# Altium PCB Digital_Clock_PCB_4.0.PcbDoc
Units mm, origin at the board's own origin, x right, y up, seen from the top; angles counter-clockwise.
Board outline 91 x 51 mm, 2 copper layers (Top Layer, Bottom Layer); 43 components, 41 nets, 191 pads, 392 vias.
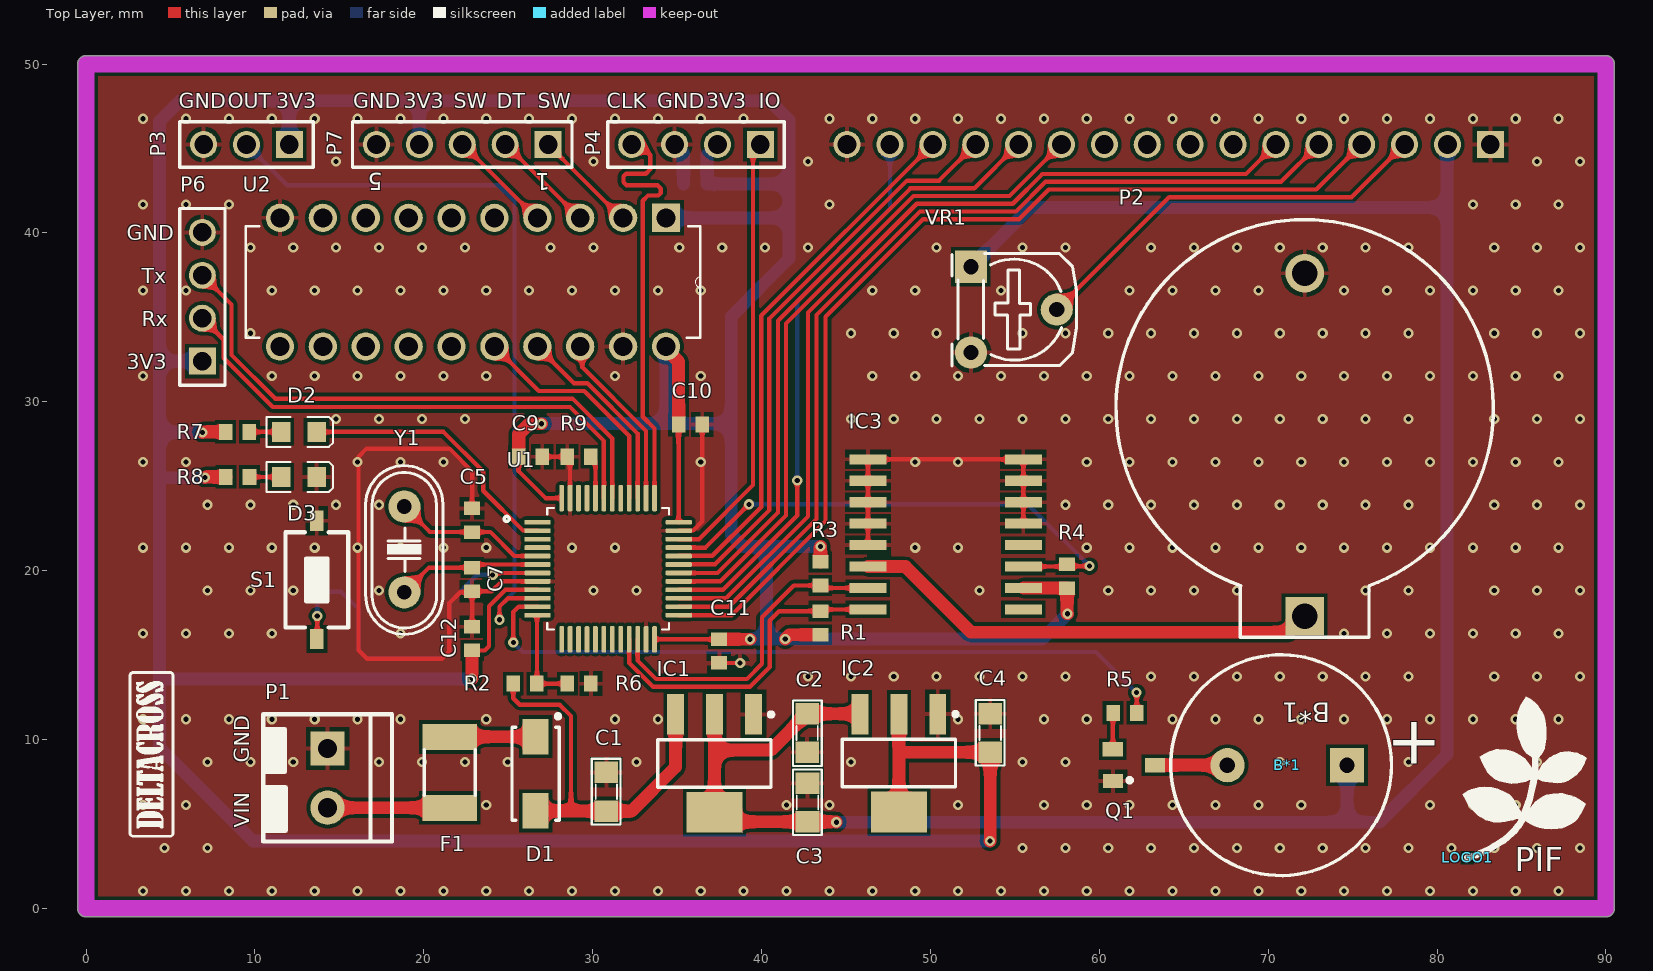
[diagram p0: Top Layer view]
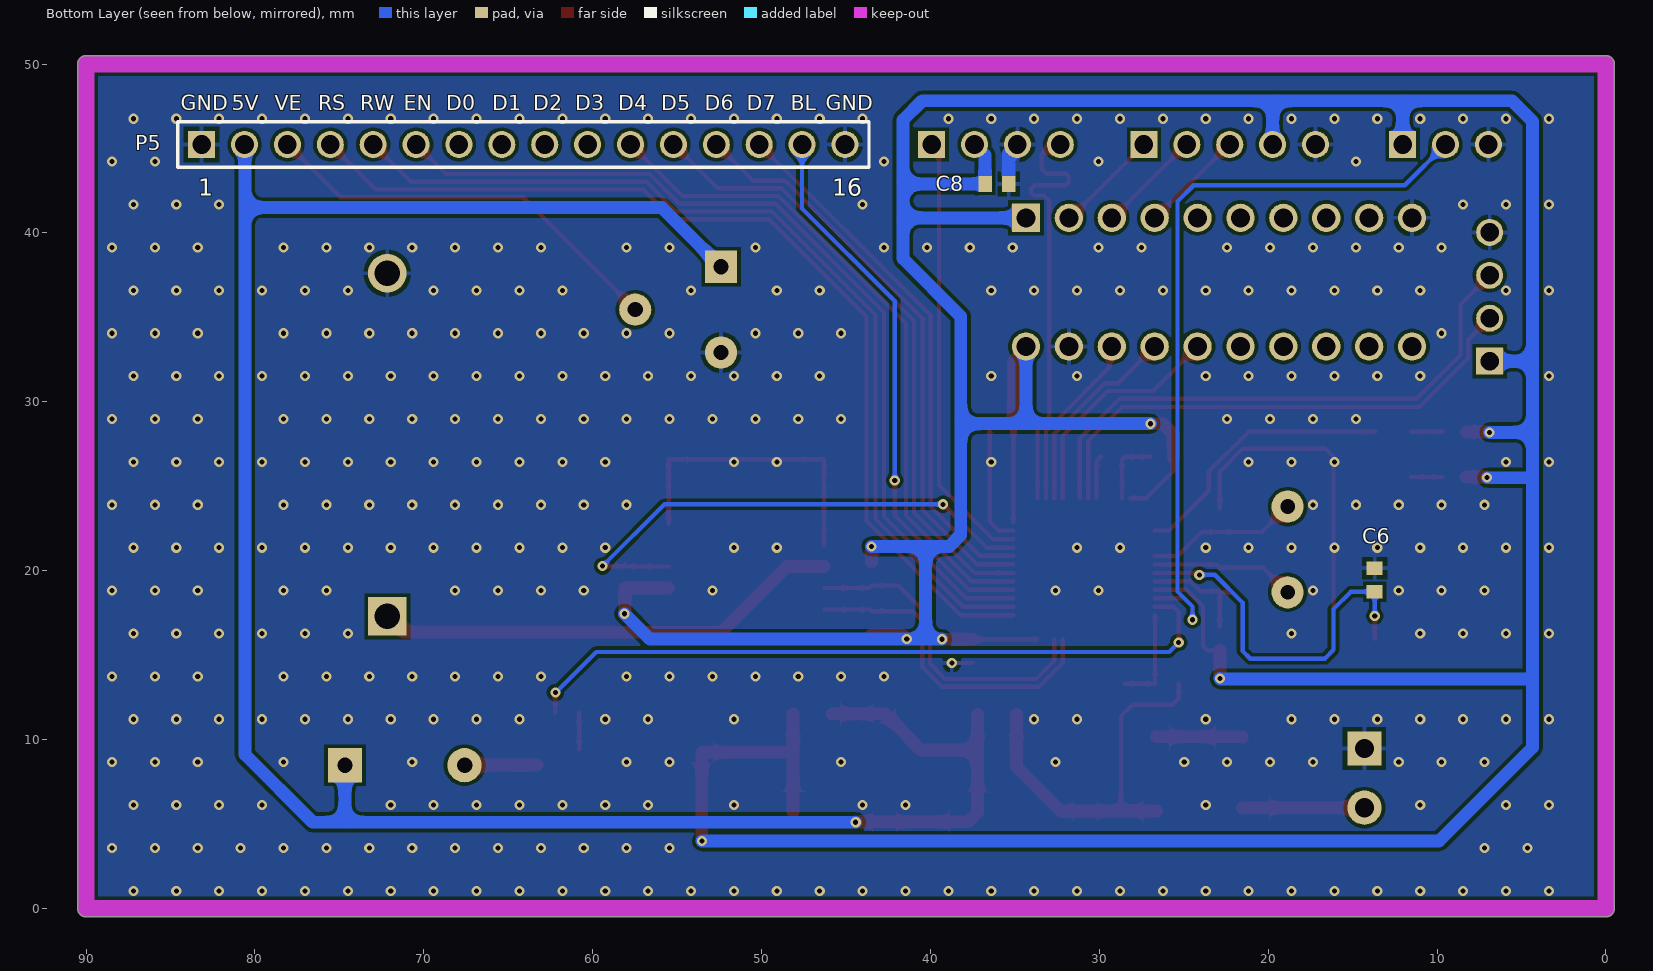
[diagram p1: Bottom Layer view, seen from below]
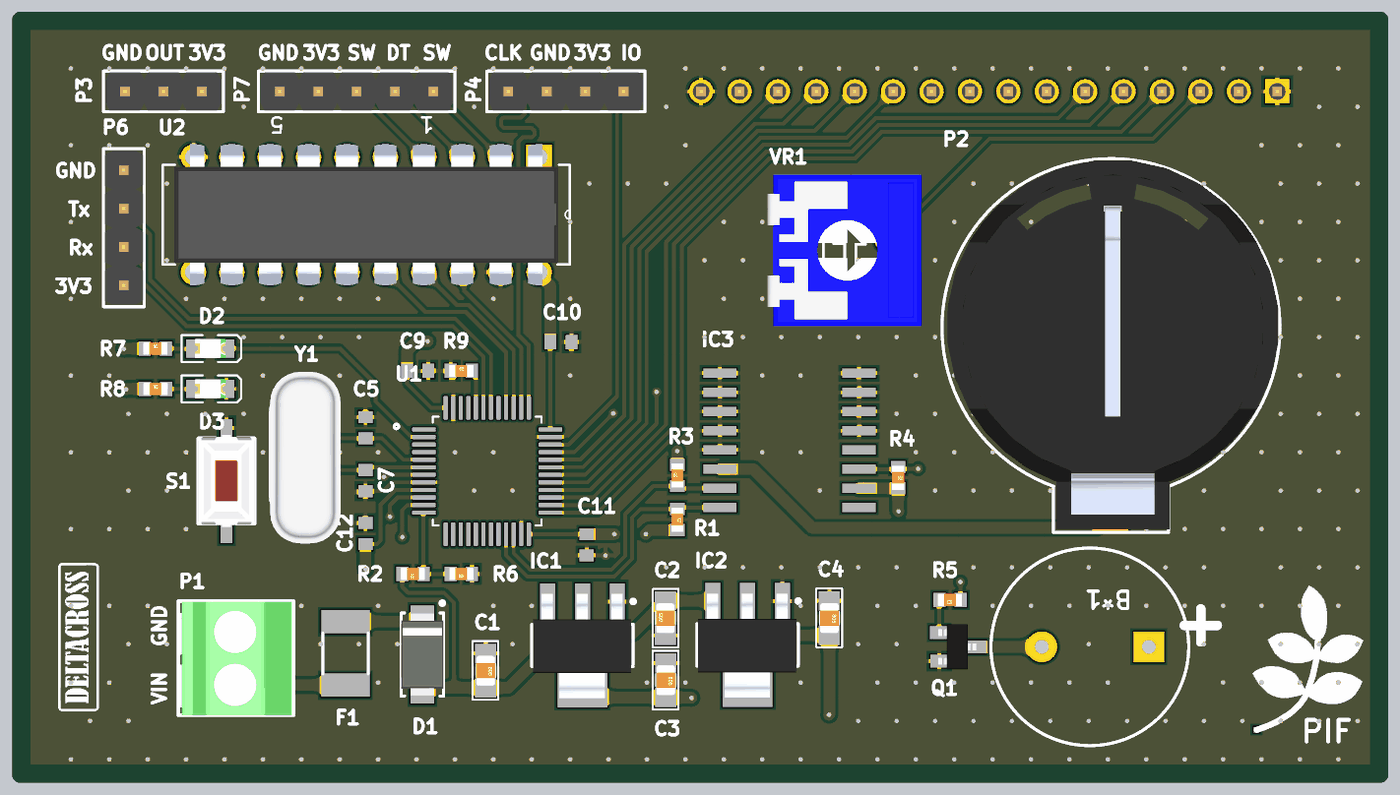
[diagram p2: 3D render of the assembled board from above, using the file's embedded part models]

## Layer stack, top to bottom
Top Solder: solder mask 0.0102, Solder Resist, Dk 3.5
Top Layer: signal copper 0.0356
Dielectric 1: dielectric 0.32, FR-4, Dk 4.8
Bottom Layer: signal copper 0.0356
Bottom Solder: solder mask 0.0102, Solder Resist, Dk 3.5

## Board outline
0,-0.5 cw(c0,0) -0.5,0 -0.5,50 cw(c0,50) 0,50.5 90,50.5 cw(c90,50) 90.5,50 90.5,0 cw(c90,0) 90,-0.5

## Design rules (kind name [scope] priority, off if disabled: settings)
Clearance [All] p1: gap=0.203 ignorepadtopadclearanceinfootprint=FALSE
PolygonConnect [All] p1: connectstyle=Relief reliefconductorwidth=0.254 reliefentries=4 polygonreliefangle="90 Angle" airgapwidth=0.254
RoutingVias [All] p1: holewidth=0.711 width=1.27 viastyle="Through Hole" minholewidth=0.3 minwidth=0.6 maxholewidth=0.711 maxwidth=1.27
SolderMaskExpansion [All] p1: expansion=0.102 istentingtop=FALSE
Width [All] p1: maxlimit=0.762 minlimit=0.254 preferedwidth=0.381
30 further rules are at their usual default settings.

## Components (designator, comment, footprint, x,y, rotation, side; value= is the part's Value field where it differs from the comment)
B*1 "Buzzer" BUZZER 72.669,8.484 r180 top
C1 "Cap Non-Pol SMD" CAP-SM-0805 30.81,8.052 r270 top value=10uF
C2 "Cap Non-Pol SMD" CAP-SM-0805 42.697,9.246 r90 top value=10uF
C3 "Cap Non-Pol SMD" CAP-SM-0805 42.723,7.417 r270 top value=10uF
C4 "Cap Non-Pol SMD" CAP-SM-0805 53.543,11.532 r270 top value=10uF
C5 "Cap Non-Pol SMD" CAP-SM-0603 22.86,22.987 r270 top value=22pF
C6 "Cap Non-Pol SMD" CAP-SM-0603 13.691,19.456 r270 bottom value=100nF
C7 "Cap Non-Pol SMD" CAP-SM-0603 22.86,19.482 r270 top value=22pF
C8 "Cap Non-Pol SMD" CAP-SM-0603 36.068,42.901 r0 bottom value=100nF
C9 "Cap Non-Pol SMD" CAP-SM-0603 26.314,26.746 r180 top value=100nF
C10 "Cap Non-Pol SMD" CAP-SM-0603 35.789,28.651 r180 top value=100nF
C11 "Cap Non-Pol SMD" CAP-SM-0603 37.49,15.24 r90 top value=100nF
C12 "Cap Non-Pol SMD" CAP-SM-0603 22.86,15.977 r270 top value=100nF
D1 "D Schottky" SS34 26.619,7.976 r270 top
D2 "LED SMD" LED_0805_Blue 12.598,28.219 r0 top
D3 "LED SMD" LED_0805_Blue 12.598,25.552 r0 top
F1 "Fuse" "FUSE SMD" 21.539,8.052 r270 top
IC1 "LM1117" SOT223-4N 37.211,8.585 r270 top value=LM317
IC2 "LM1117" SOT223-4N 48.133,8.611 r270 top value=LM317
IC3 "DS3231" SO16W 50.902,22.149 r90 top
LOGO1 "LOGO PIF" "PIF LOGO BIG SSTOP" 81.509,2.642 r0 top
P1 "Domino 2" "DOMINO SMALL 2" 15.57,9.469 r270 top
P2 "VBAT" "VBAT CR2030" 72.161,27.457 r270 top
P3 "61300311121" 61300311121 9.498,45.237 r180 top
P4 "61300411121" 61300411121 36.119,45.237 r180 top
P5 "61301611121" 61301611121 64.11,45.237 r180 bottom
P6 "61300411121" 61300411121 6.883,36.22 r90 top
P7 "61300511121" 61300511121 22.276,45.237 r180 top
Q1 "C1815" SOT23B 62.052,8.484 r270 top
R1 "RESISTOR SMD" RES-SM-0603 43.485,17.591 r270 top value=10K
R2 "RESISTOR SMD" RES-SM-0603 26.684,13.31 r180 top value=20K
R3 "RESISTOR SMD" RES-SM-0603 43.485,19.137 r90 top value=10K
R4 "RESISTOR SMD" RES-SM-0603 58.09,20.36 r270 top value=10K
R5 "RESISTOR SMD" RES-SM-0603 62.205,11.582 r180 top value=22K
R6 "RESISTOR SMD" RES-SM-0603 29.885,13.31 r180 top value=10K
R7 "RESISTOR SMD" RES-SM-0603 8.28,28.219 r0 top value=1K
R8 "RESISTOR SMD" RES-SM-0603 8.292,25.552 r0 top value=1K
R9 "RESISTOR SMD" RES-SM-0603 28.51,26.746 r0 top value=100K
S1 "Tact SW - 2Pin" SW-SMD 13.665,19.456 r90 top
U1 "STM32F103C8T6" QFP50P900X900X160-48N 30.912,20.117 r0 top
U2 "SN74HC245N" DIP254P762X508-20 11.481,33.274 r270 top
VR1 "10K" "Varistor 1" 52.4,37.998 r270 top value="VR 10K"
Y1 "XTAL" XT2 18.847,21.26 r90 top

## Footprints (in the part's own frame and the unit in brackets; to place one, negate y for a bottom-side part, rotate by r counter-clockwise, add the part's x,y. Pads: shape width x height; smd on the part's side, far side on the other; paste and mask are expansions set on the pad)
61300311121 [mm] "Pin Header, pitch 2.54 mm, THT, Vertical, single row, 3p"
  rect 1.6x1.6 hole 1.1: 1(-2.54,0)
  round 1.6 hole 1.1: 2(0,0) 3(2.54,0)
  silkscreen extent -3.96,-1.35 3.96,1.35, body extent -3.81,-1.27 3.81,1.27, height 8.57
61300411121 [mm] "Pin Header, pitch 2.54 mm, THT, Vertical, single row, 4p"
  rect 1.6x1.6 hole 1.1: 1(-3.81,0)
  round 1.6 hole 1.1: 2(-1.27,0) 3(1.27,0) 4(3.81,0)
  silkscreen extent -5.23,-1.35 5.23,1.35, body extent -5.08,-1.27 5.08,1.27, height 8.57
61300511121 [mm] "Pin Header, pitch 2.54 mm, THT, Vertical, single row, 5p"
  rect 1.6x1.6 hole 1.1: 1(-5.08,0)
  round 1.6 hole 1.1: 2(-2.54,0) 3(0,0) 4(2.54,0) 5(5.08,0)
  silkscreen extent -6.5,-1.35 6.5,1.35, body extent -6.35,-1.27 6.35,1.27, height 8.57
61301611121 [mm] "Pin Header, pitch 2.54 mm, THT, Vertical, single row, 16p"
  rect 1.6x1.6 hole 1.1: 1(-19.05,0)
  round 1.6 hole 1.1: 2(-16.51,0) 3(-13.97,0) 4(-11.43,0) 5(-8.89,0) 6(-6.35,0) 7(-3.81,0) 8(-1.27,0) 9(1.27,0) 10(3.81,0) 11(6.35,0) 12(8.89,0) 13(11.43,0) 14(13.97,0) 15(16.51,0) 16(19.05,0)
  silkscreen extent -20.47,-1.35 20.47,1.35, body extent -20.32,-1.27 20.32,1.27, height 8.57
BUZZER [mil]
  rect 80x80 hole 36: 1(-78.73,0)
  round 80 hole 36: 2(200,0)
  silkscreen extent -182,-257 332,257
CAP-SM-0603 [mm] "SMD Ceramic Capacitor Size 0603"
  rect 0.8x0.95 smd: 1(-0.7,0) 2(0.7,0)
  body extent -0.85,-0.45 0.85,0.45, height 0.6
CAP-SM-0805 [mil]
  rect 50x55 smd: 1(0,0) 2(90,0)
  silkscreen extent -32,-34 121,33, body extent 6,-25 84,25, height 31
DIP254P762X508-20 [mil]
  rect 66x66 hole 44: 1(-300,900)
  round 66 hole 44: 2(-300,800) 3(-300,700) 4(-300,600) 5(-300,500) 6(-300,400) 7(-300,300) 8(-300,200) 9(-300,100) 10(-300,0) 11(0,0) 12(0,100) 13(0,200) 14(0,300) 15(0,400) 16(0,500) 17(0,600) 18(0,700) 19(0,800) 20(0,900)
  silkscreen extent -280,-80 -20,980, body extent -365,-50 65,950, height 200
"DOMINO SMALL 2" [mil] "3.5 mm"
  rect 80x80 hole 45: 1(0,-50)
  round 80 hole 45: 2(137.8,-50)
  silkscreen extent -80,-203 217,100, body extent -79,-192 217,95, height 335
"FUSE SMD" [mm] "SMD FUSE"
  rect 1.55x3.21 smd: 1(-2.1,0) 2(2.1,0)
  silkscreen extent -1.35,-1.5 1.35,1.51, body extent -2.37,-1.71 2.36,1.71, height 0.75
LED_0805_Blue [mm] "Chip LED, 2-Leads, Body 2.0x1.3mm, IPC Medium Density"
  rect 1.1x1.2 smd: 1(-1.05,0) 2(1.05,0)
  silkscreen extent -1.91,-0.89 2.03,0.89, body extent -1,-0.63 1,0.62, height 0.68
"PIF LOGO BIG SSTOP" [mil]
  rect 15x15 smd: 1(11,14)
  silkscreen extent 0,14 289,389
QFP50P900X900X160-48N [mm]
  rrect50% 1.56x0.28 smd: 1(-4.18,2.75) 2(-4.18,2.25) 3(-4.18,1.75) 4(-4.18,1.25) 5(-4.18,0.75) 6(-4.18,0.25) 7(-4.18,-0.25) 8(-4.18,-0.75) 9(-4.18,-1.25) 10(-4.18,-1.75) 11(-4.18,-2.25) 12(-4.18,-2.75) 25(4.18,-2.75) 26(4.18,-2.25) 27(4.18,-1.75) 28(4.18,-1.25) 29(4.18,-0.75) 30(4.18,-0.25) 31(4.18,0.25) 32(4.18,0.75) 33(4.18,1.25) 34(4.18,1.75) 35(4.18,2.25) 36(4.18,2.75)
  rrect50% 0.28x1.56 smd: 13(-2.75,-4.18) 14(-2.25,-4.18) 15(-1.75,-4.18) 16(-1.25,-4.18) 17(-0.75,-4.18) 18(-0.25,-4.18) 19(0.25,-4.18) 20(0.75,-4.18) 21(1.25,-4.18) 22(1.75,-4.18) 23(2.25,-4.18) 24(2.75,-4.18) 37(2.75,4.18) 38(2.25,4.18) 39(1.75,4.18) 40(1.25,4.18) 41(0.75,4.18) 42(0.25,4.18) 43(-0.25,4.18) 44(-0.75,4.18) 45(-1.25,4.18) 46(-1.75,4.18) 47(-2.25,4.18) 48(-2.75,4.18)
  silkscreen extent -6.15,-3.6 3.6,3.6
RES-SM-0603 [mm]
  rect 0.8x0.95 smd: 1(-0.014,0) 2(1.386,0)
  body extent -0.11,-0.4 1.49,0.4, height 0.3
SO16W [mm]
  rect 0.6x2.2 smd: 1(-4.445,-4.6) 2(-3.175,-4.6) 3(-1.905,-4.6) 4(-0.635,-4.6) 5(0.635,-4.6) 6(1.905,-4.6) 7(3.175,-4.6) 8(4.445,-4.6) 9(4.445,4.6) 10(3.175,4.6) 11(1.905,4.6) 12(0.635,4.6) 13(-0.635,4.6) 14(-1.905,4.6) 15(-3.175,4.6) 16(-4.445,4.6)
SOT23B [mm] "SOT 23B"
  rect 0.85x1.2 smd: 1(0.94,-1.245) 2(0,1.25) 3(-0.95,-1.25)
  silkscreen extent 0.77,-0.38 1.02,-0.13, body extent -1.5,-1.3 1.5,1.2, height 1.06
SOT223-4N [mm] "SOT223, 4-Leads, Body 6.5x3.5mm, Pitch 2.3mm, Lead Span 7mm, IPC Medium Density"
  rect 2.4x1 smd: 1(-2.9,2.3) 2(-2.9,0) 3(-2.9,-2.3)
  rect 2.4x3.3 smd: 4(2.9,0)
  silkscreen extent -3.02,-3.35 1.4,3.48, body extent -3.39,-3.27 3.5,3.23, height 1.72
SS34 [mm] "DO-214-AC/SMA Molded Diode, Body 5.3x2.6mm, IPC Medium Density"
  rect 2.1x1.55 smd: 1(-2.2,0) 2(2.2,0)
  silkscreen extent -3.52,-1.4 2.75,1.45, body extent -2.75,-1.4 2.75,1.4, height 2.3
SW-SMD [mm] "Switch SMD type"
  rect 1.2x0.8 smd: 1(-3.5,0) 2(3.5,0)
  silkscreen extent -2.82,-1.85 2.82,1.85, body extent -3.05,-1.85 3.05,1.85, height 2.5
"Varistor 1" [mil] "Resistor Variable"
  rect 75x75 hole 35: 1(0,0)
  round 75 hole 35: 2(100,200) 3(200,0)
  silkscreen extent -31,-44 231,246, body extent -68,-117 326,285, height 165
"VBAT CR2030" [mil]
  rect 90x90 hole 60: 1(400,0)
  round 90 hole 60: 2(-400,0)
  silkscreen extent -525,-440 449,440, body extent -523,-428 442,438, height 335
XT2 [mil] "Footpin for Crystal 2 pin"
  round 75 hole 34: 1(-100,0) 2(100,0)
  silkscreen extent -198,-90 195,90, body extent -233,-93 213,90, height 138

## Part data
C1 C2 C3 C4 C5 C6 C7 C8 C9 C10 C11 C12: "Capacitor"
D1: "Schottky Diode", Code_JEDEC=DO-214-AA, LatestRevisionDate=17-Jul-2002, LatestRevisionNote="Re-released for DXP Platform.", PackageDescription="DO-214-AA/SMB; 2 C-Bend Leads; Body 5.3 x 3.6 mm, inc. leads (LxW)", PackageReference=SMB, Published=8-Jun-2000, Publisher="Altium Limited"
D2 D3: "LED"
IC1 IC2: "Available in 1.8V, 2.5V, 2.85V, 3.3V, 5V, and  Adjustable Versions"
IC3: Package=None, Availability=Unavailable, MP=DS3231, Price=None
P1: "Domino, 2-Pin", LatestRevisionDate=17-Jul-2002, LatestRevisionNote="Re-released for DXP Platform.", Publisher="Altium Limited"
P2: library part "VBAT CR2032", "CR2032", Manufacturer="DANTONA INDUSTRIES", Manufacturer Part Number="CR2032 SANYO", ComponentLink1Description=http://www.farnell.com/datasheets/1797668.pdf, ComponentLink1URL=http://www.farnell.com/datasheets/1797668.pdf, ComponentLink2Description=/datasheets/DANTONA/CRSANYO.pdf, ComponentLink2URL=/datasheets/DANTONA/CRSANYO.pdf, Pricing 1="1=0.768, 5=0.655, 10=0.615, 25=0.565, 50=0.51, 100=0.46, 250=0.41 (USD)", RoHS=NA, Stock 1=1694, Supplier 1=Newark
P3: "WR-PHD Pin Header, THT, pitch 2.54mm, Single Row, Vertical, 3p", Contact Resistance=20mOhm, Manufacturer="Wurth Elektronik", Operating Temperature="-40 to +105degC", Rated Current=3A, Withstanding Voltage=500VAC, Working Voltage=250VAC, ComponentLink1Description=Manufacturer, ComponentLink1URL=http://www.we-online.de, ComponentLink2Description=Datasheet, ComponentLink2URL=https://www.we-online.com/catalog/datasheet/61300311121.pdf, Gender="Pin Header", Manufacturer Part Number=61300311121, Mounting Technology=THT, Orientation=Vertical, Packaging=Bag, Pin Number=3, Pitch=2.54mm, Published Date="May 2020", Row Number=Single
P4 P6: "WR-PHD Pin Header, THT, pitch 2.54mm, Single Row, Vertical, 4p", Contact Resistance=20mOhm, Manufacturer="Wurth Elektronik", Operating Temperature="-40 to +105degC", Rated Current=3A, Withstanding Voltage=500VAC, Working Voltage=250VAC, ComponentLink1Description=Manufacturer, ComponentLink1URL=http://www.we-online.de, ComponentLink2Description=Datasheet, ComponentLink2URL=https://www.we-online.com/catalog/datasheet/61300411121.pdf, Gender="Pin Header", Manufacturer Part Number=61300411121, Mounting Technology=THT, Orientation=Vertical, Packaging=Bag, Pin Number=4, Pitch=2.54mm, Published Date="May 2020", Row Number=Single
P5: "WR-PHD Pin Header, THT, pitch 2.54mm, Single Row, Vertical, 16p", Contact Resistance=20mOhm, Manufacturer="Wurth Elektronik", Operating Temperature="-40 to +105degC", Rated Current=3A, Withstanding Voltage=500VAC, Working Voltage=250VAC, ComponentLink1Description=Manufacturer, ComponentLink1URL=http://www.we-online.de, ComponentLink2Description=Datasheet, ComponentLink2URL=https://www.we-online.com/catalog/datasheet/61301611121.pdf, Gender="Pin Header", Manufacturer Part Number=61301611121, Mounting Technology=THT, Orientation=Vertical, Packaging=Bag, Pin Number=16, Pitch=2.54mm, Published Date="May 2020", Row Number=Single
P7: "WR-PHD Pin Header, THT, pitch 2.54mm, Single Row, Vertical, 5p", Contact Resistance=20mOhm, Manufacturer="Wurth Elektronik", Operating Temperature="-40 to +105degC", Rated Current=3A, Withstanding Voltage=500VAC, Working Voltage=250VAC, ComponentLink1Description=Manufacturer, ComponentLink1URL=http://www.we-online.de, ComponentLink2Description=Datasheet, ComponentLink2URL=https://www.we-online.com/catalog/datasheet/61300511121.pdf, Gender="Pin Header", Manufacturer Part Number=61300511121, Mounting Technology=THT, Orientation=Vertical, Packaging=Bag, Pin Number=5, Pitch=2.54mm, Published Date="May 2020", Row Number=Single
Q1: "NPN Bipolar Transistor"
R1 R2 R3 R4 R5 R6 R7 R8 R9: "Resistor"
S1: "Switch button 2 pin"
U1: "Mainstream Performance line, ARM Cortex-M3 MCU with 64 Kbytes Flash, 72 MHz CPU, motor control, USB and CAN", Package=None, Availability=Unavailable, MP=STM32F103C8T6, Price=None
U2: "Octal Bus Transceivers With 3-State Outputs 20-PDIP -40 to 85", Package="PDIP-20 Texas Instruments", Availability=Good, Check_prices=https://www.snapeda.com/parts/SN74HC245N/Texas%20Instruments/view-part/53757/?ref=eda, MF="Texas Instruments", MP=SN74HC245N, Price=None, Purchase-URL=https://pricing.snapeda.com/search/part/SN74HC245N/?ref=eda, SnapEDA_Link=https://www.snapeda.com/parts/SN74HC245N/Texas%20Instruments/view-part/53757/?ref=snap
VR1: library part "Var Resistor", "Var Resistor"
Y1: "Crystal Oscillator", LatestRevisionDate=17-Jul-2002, LatestRevisionNote="Re-released for DXP Platform.", PackageDescription="Crystal, Thru-Hole; 2 Leads; Body 3.1 x 8.2 mm (Dia.xH)", PackageReference=R38, Published=8-Jun-2000, Publisher="Altium Limited"

## Via types
v1: diameter 0.6, hole 0.3, Top Layer to Bottom Layer, tented both sides, 392 vias

## Nets (pads, with @x,y where several pads share a name; then routed paths per layer and width w, separated by ;. In a path a pad name is that pad's centre, name@x,y a point inside that pad or via, vN(x,y) a via of type N, cw(c..) or ccw(c..) an arc to the next point about the centre after c; other vN are vias at no path point)
3V3: C4.2 C8.2 C9.2 C10.2 C11.2 C12.2 IC2.2 IC2.4 IC3.2 P3.1 P4.2 P6.1 P7.4 R1.2 R3.2 R4.2 R7.1 R8.1 U1.9 U1.24 U1.36 U1.48 U2.1 U2.20 | length 303.4
  Top Layer w0.254: C12.2 23.608,15.277 23.855,15.524 23.855,17.889 24.833,18.867 U1.9 ; C9.2 25.614,25.897 27.214,24.297 U1.48 ; U1.24 33.665,15.94 C11.2 ; C10.2 35.089,22.87 U1.36
  Top Layer w0.762: v1(6.883,28.194) 6.909,28.219 R7.1 ; v1(7.036,25.527) 7.061,25.552 R8.1 ; v1(22.86,13.614) C12.2 ; C9.2 25.614,28.078 26.238,28.702 v1(26.975,28.702) ; U2.20 34.341,33.118 35.089,32.37 C10.2 ; C11.2 v1(39.319,15.94) ; v1(41.402,15.951) 41.656,16.205 R1.2 ; R3.2 v1(43.485,21.438) ; IC2.4 48.133,9.271 ; IC2.2 48.133,9.271 ; v1(53.518,3.988) 53.543,4.013 C4.2 48.158,9.246 48.133,9.271 ; IC3.2 R4.2 58.09,17.475 v1(58.115,17.45)
  Bottom Layer w0.762: v1(6.883,28.194) 4.343,28.194 ; P6.1 4.343,32.41 ; v1@7.01,25.502 4.343,25.502 ; P3.1 12.04,47.828 ; P7.4 19.736,47.828 ; v1(22.86,13.614) 22.835,13.589 4.343,13.589 ; v1@26.979,28.706 34.341,28.706 ; U2.20 34.341,28.706 ; U2.1 41.631,40.894 ; P4.2 36.768,44.617 C8.2 41.631,42.901 ; v1@39.33,15.951 40.284,15.951 ; v1(43.485,21.438) 40.284,21.438 ; v1(53.518,3.988) 9.881,3.988 4.343,9.525 4.343,13.589 ; v1(58.115,17.45) 56.617,15.951 v1(41.402,15.951) 40.284,15.951 ; 4.343,13.589 4.343,25.502 ; 4.343,25.502 4.343,28.194 ; 4.343,28.194 4.343,32.41 ; 4.343,32.41 4.343,46.609 5.563,47.828 12.04,47.828 ; 12.04,47.828 19.736,47.828 ; 19.736,47.828 40.488,47.828 41.631,46.685 41.631,42.901 ; 34.341,28.706 38.202,28.706 ; 38.202,28.706 38.202,22.123 38.887,21.438 40.284,21.438 ; 38.202,28.706 38.202,35.052 41.631,38.481 41.631,40.894 ; 40.284,15.951 40.284,21.438 ; 41.631,40.894 41.631,42.901
5V: B*1.1 C2.2 C3.2 IC1.2 IC1.4 IC2.3 P5.2 VR1.1 | length 129.3
  Top Layer w0.762: IC1.2 37.211,9.373 ; C2.2@42.38,11.214 40.538,9.373 37.211,9.373 ; C2.2 45.812,11.532 IC2.3 ; v1(44.425,5.105) 44.399,5.131 C3.2 37.765,5.131 IC1.4 37.211,9.373
  Bottom Layer w0.762: v1(44.425,5.105) 74.676,5.105 ; VR1.1 55.905,41.504 80.594,41.504 ; B*1.1@74.676,8.477 74.676,5.105 ; P5.2@80.594,45.237 80.594,41.504 ; 74.676,5.105 76.581,5.105 80.594,9.119 80.594,41.504
ADC_PIN: R2.1 R6.2 U1.12 | length 5.9
  Top Layer w0.254: U1.12 26.711,17.367 26.698,17.354 R2.1 R6.2
BL: P5.15 U1.28 | length 33.1
  Top Layer w0.254: U1.28 37.714,18.867 42.113,23.266 v1(42.113,25.349)
  Bottom Layer w0.254: v1(42.113,25.349) 42.113,35.966 47.6,41.453 P5.15
BOOT0: R9.2 U1.44 | length 2.6
  Top Layer w0.254: R9.2 30.162,26.48 U1.44
BUZZER: R5.1 U1.11 | length 42.7
  Top Layer w0.254: v1(25.298,15.748) 25.298,17.551 25.614,17.867 U1.11 ; v1(62.205,12.776) 62.219,12.762 R5.1
  Bottom Layer w0.254: v1(25.298,15.748) 25.857,15.189 59.792,15.189 v1(62.205,12.776)
D4: P5.11 U1.29 | length 40
  Top Layer w0.254: U1.29 37.553,19.367 41.453,23.266 41.453,34.636 49,42.184 54.68,42.184 P5.11@57.734,45.237
D5: P5.12 U1.30 | length 37.3
  Top Layer w0.254: U1.30 37.393,19.867 40.97,23.444 40.97,34.8 48.811,42.641 52.598,42.641 P5.12@55.194,45.237
D6: P5.13 U1.31 | length 34.5
  Top Layer w0.254: U1.31 35.105,20.38 37.245,20.38 40.462,23.597 40.462,34.939 48.621,43.098 50.515,43.098 P5.13@52.654,45.237
D7: P5.14 U1.32 | length 31.8
  Top Layer w0.254: U1.32 35.105,20.88 37.085,20.88 39.507,23.302 39.509,23.302 39.98,23.773 39.98,35.103 P5.14@50.114,45.237
DHT_PIN: P3.2 U1.10 | length 45.6
  Top Layer w0.254: v1(24.486,17.094) 24.486,17.873 24.979,18.367 U1.10
  Bottom Layer w0.254: P3.2 11.911,42.824 24.409,42.824 25.375,41.859 25.375,18.771 24.486,17.882 v1(24.486,17.094)
EN: P5.6 U1.27 | length 53.5
  Top Layer w0.254: U1.27 37.899,18.367 42.748,23.216 42.748,35.285 49.19,41.726 54.87,41.726 56.628,43.485 68.682,43.485 P5.6@70.434,45.237
GND: C1.1 C2.1 C3.1 C4.1 C5.1 C6.1 C7.2 C8.1 C9.1 C10.1 C11.1 C12.1 D3.2 IC1.1 IC2.1 IC3.5 IC3.6 IC3.7 IC3.8 IC3.9 IC3.10 IC3.11 IC3.12 IC3.13 P1.1 P2.2 P3.3 P4.3 P5.1 P5.16 P6.4 P7.5 Q1.1 R6.1 R9.1 S1.2 U1.8 U1.23 U1.35 U1.47 U2.10 U2.19 VR1.3 | length 70.9
  Top Layer w0.254: C12.1 C7.2 ; C5.1 22.86,25.883 21.514,27.229 16.612,27.229 16.129,26.746 16.129,15.291 16.637,14.783 21.057,14.783 21.514,15.24 21.514,18.085 22.153,18.724 22.802,18.724 C7.2 ; U1.8 24.599,19.367 24.014,18.782 C7.2 ; C9.1 R9.1 28.662,26.58 U1.47 ; U1.35 35.105,22.38 35.951,22.38 36.489,22.918 C10.1 ; C11.1 38.724,14.54 v1(38.735,14.529) ; IC3.13 IC3.12 IC3.11 IC3.10 IC3.9 IC3.8 IC3.7 IC3.6 IC3.5
  Bottom Layer w0.762: P4.3 35.368,44.718 C8.1
  other v1: 3.378,1.041 5.918,1.041 8.458,1.041 10.998,1.041 13.538,1.041 16.078,1.041 18.618,1.041 21.158,1.041 23.698,1.041 26.238,1.041 28.778,1.041 31.318,1.041 33.858,1.041 36.398,1.041 38.938,1.041 41.478,1.041 44.018,1.041 46.558,1.041 49.098,1.041 51.638,1.041 54.178,1.041 56.718,1.041 59.258,1.041 61.798,1.041 64.338,1.041 66.878,1.041 69.418,1.041 71.958,1.041 74.498,1.041 77.038,1.041 79.578,1.041 82.118,1.041 84.658,1.041 87.198,1.041 4.648,3.581 7.188,3.581 55.448,3.581 57.988,3.581 60.528,3.581 63.068,3.581 65.608,3.581 68.148,3.581 70.688,3.581 73.228,3.581 75.768,3.581 78.308,3.581 80.848,3.581 83.388,3.581 85.928,3.581 88.468,3.581 3.378,6.121 5.918,6.121 10.998,6.121 23.698,6.121 41.478,6.121 44.018,6.121 51.638,6.121 56.718,6.121 59.258,6.121 61.798,6.121 64.338,6.121 66.878,6.121 69.418,6.121 71.958,6.121 79.578,6.121 82.118,6.121 84.658,6.121 87.198,6.121 7.188,8.661 9.728,8.661 12.268,8.661 17.348,8.661 19.888,8.661 22.428,8.661 24.968,8.661 32.588,8.661 45.288,8.661 55.448,8.661 57.988,8.661 70.688,8.661 78.308,8.661 83.388,8.661 85.928,8.661 88.468,8.661 3.378,11.201 5.918,11.201 8.458,11.201 10.998,11.201 13.538,11.201 16.078,11.201 18.618,11.201 23.698,11.201 31.318,11.201 33.858,11.201 51.638,11.201 56.718,11.201 59.258,11.201 64.338,11.201 66.878,11.201 69.418,11.201 71.958,11.201 74.498,11.201 77.038,11.201 79.578,11.201 82.118,11.201 84.658,11.201 87.198,11.201 42.748,13.741 45.288,13.741 47.828,13.741 50.368,13.741 52.908,13.741 55.448,13.741 57.988,13.741 63.068,13.741 65.608,13.741 68.148,13.741 70.688,13.741 73.228,13.741 75.768,13.741 78.308,13.741 83.388,13.741 85.928,13.741 88.468,13.741 3.378,16.281 5.918,16.281 8.458,16.281 10.998,16.281 18.618,16.281 74.498,16.281 77.038,16.281 79.578,16.281 82.118,16.281 84.658,16.281 87.198,16.281 7.188,18.821 9.728,18.821 12.268,18.821 17.348,18.821 30.048,18.821 32.588,18.821 52.908,18.821 60.528,18.821 63.068,18.821 65.608,18.821 68.148,18.821 75.768,18.821 78.308,18.821 83.388,18.821 85.928,18.821 88.468,18.821 3.378,21.361 5.918,21.361 8.458,21.361 10.998,21.361 13.538,21.361 16.078,21.361 18.618,21.361 21.158,21.361 23.698,21.361 28.778,21.361 31.318,21.361 49.098,21.361 51.638,21.361 59.258,21.361 61.798,21.361 64.338,21.361 66.878,21.361 69.418,21.361 71.958,21.361 74.498,21.361 77.038,21.361 79.578,21.361 82.118,21.361 84.658,21.361 87.198,21.361 7.188,23.901 9.728,23.901 12.268,23.901 14.808,23.901 17.348,23.901 57.988,23.901 60.528,23.901 63.068,23.901 65.608,23.901 68.148,23.901 70.688,23.901 73.228,23.901 75.768,23.901 78.308,23.901 83.388,23.901 85.928,23.901 88.468,23.901 3.378,26.441 5.918,26.441 16.078,26.441 18.618,26.441 21.158,26.441 36.398,26.441 49.098,26.441 51.638,26.441 59.258,26.441 61.798,26.441 64.338,26.441 66.878,26.441 69.418,26.441 71.958,26.441 74.498,26.441 77.038,26.441 79.578,26.441 82.118,26.441 84.658,26.441 87.198,26.441 14.808,28.981 17.348,28.981 19.888,28.981 22.428,28.981 45.288,28.981 47.828,28.981 50.368,28.981 52.908,28.981 55.448,28.981 57.988,28.981 60.528,28.981 63.068,28.981 65.608,28.981 68.148,28.981 70.688,28.981 73.228,28.981 75.768,28.981 78.308,28.981 83.388,28.981 85.928,28.981 88.468,28.981 3.378,31.521 10.998,31.521 13.538,31.521 16.078,31.521 18.618,31.521 21.158,31.521 23.698,31.521 31.318,31.521 36.398,31.521 46.558,31.521 49.098,31.521 51.638,31.521 54.178,31.521 56.718,31.521 59.258,31.521 61.798,31.521 64.338,31.521 66.878,31.521 69.418,31.521 71.958,31.521 74.498,31.521 77.038,31.521 79.578,31.521 82.118,31.521 84.658,31.521 87.198,31.521 9.728,34.061 45.288,34.061 47.828,34.061 50.368,34.061 55.448,34.061 57.988,34.061 60.528,34.061 63.068,34.061 65.608,34.061 68.148,34.061 70.688,34.061 73.228,34.061 75.768,34.061 78.308,34.061 83.388,34.061 85.928,34.061 88.468,34.061 3.378,36.601 5.918,36.601 10.998,36.601 13.538,36.601 16.078,36.601 18.618,36.601 21.158,36.601 23.698,36.601 26.238,36.601 28.778,36.601 31.318,36.601 33.858,36.601 36.398,36.601 46.558,36.601 49.098,36.601 54.178,36.601 61.798,36.601 64.338,36.601 66.878,36.601 69.418,36.601 74.498,36.601 77.038,36.601 79.578,36.601 82.118,36.601 84.658,36.601 87.198,36.601 9.728,39.141 12.268,39.141 14.808,39.141 17.348,39.141 19.888,39.141 22.428,39.141 27.508,39.141 30.048,39.141 35.128,39.141 37.668,39.141 40.208,39.141 42.748,39.141 50.368,39.141 55.448,39.141 57.988,39.141 63.068,39.141 65.608,39.141 68.148,39.141 70.688,39.141 73.228,39.141 75.768,39.141 78.308,39.141 83.388,39.141 85.928,39.141 88.468,39.141 3.378,41.681 5.918,41.681 8.458,41.681 44.018,41.681 82.118,41.681 84.658,41.681 87.198,41.681 14.808,44.221 30.048,44.221 42.748,44.221 85.928,44.221 88.468,44.221 3.378,46.761 5.918,46.761 8.458,46.761 10.998,46.761 13.538,46.761 16.078,46.761 18.618,46.761 21.158,46.761 23.698,46.761 26.238,46.761 28.778,46.761 31.318,46.761 33.858,46.761 36.398,46.761 38.938,46.761 44.018,46.761 46.558,46.761 49.098,46.761 51.638,46.761 54.178,46.761 56.718,46.761 59.258,46.761 61.798,46.761 64.338,46.761 66.878,46.761 69.418,46.761 71.958,46.761 74.498,46.761 77.038,46.761 79.578,46.761 82.118,46.761 84.658,46.761 87.198,46.761
I2C_SCL: IC3.16 R1.1 U1.21 | length 19.6
  Top Layer w0.254: U1.21 32.162,15.194 32.162,14.537 33.567,13.132 39.319,13.132 40.488,14.3 40.488,17.043 41.049,17.605 R1.1 43.583,17.704 IC3.16
I2C_SDA: IC3.15 R3.1 U1.22 | length 19.3
  Top Layer w0.254: U1.22 32.662,14.684 33.757,13.589 39.13,13.589 40.03,14.49 40.03,17.247 41.907,19.123 R3.1 43.634,18.974 IC3.15
NetB*1_2: B*1.2 Q1.2 | length 4.3
  Top Layer w0.762: Q1.2 B*1.2
NetD1_1: D1.1 F1.1 | length 5.1
  Top Layer w0.762: F1.1 21.551,10.164 26.607,10.164 D1.1
NetD2_1: D2.1 R7.2 | length 1.9
  Top Layer w0.254: R7.2 D2.1
NetD3_1: D3.1 R8.2 | length 1.9
  Top Layer w0.254: R8.2 D3.1
NetF1_2: F1.2 P1.2 | length 7.2
  Top Layer w0.762: P1.2 14.309,5.96 21.531,5.96 F1.2
NetIC3_14: IC3.14 P2.1 | length 27.9
  Top Layer w0.762: IC3.14 48.514,20.244 52.4,16.358 71.222,16.358 P2.1
NetP5_3: P5.3 VR1.2 | length 24.6
  Top Layer w0.254: VR1.2 64.135,42.113 74.93,42.113 P5.3@78.054,45.237
NetP7_1: P7.1 U2.2 | length 6.2
  Top Layer w0.254: P7.1 31.699,40.894 U2.2
NetP7_2: P7.2 U2.3 | length 6.2
  Top Layer w0.254: P7.2 24.867,45.237 29.21,40.894 U2.3
NetP7_3: P7.3 U2.4 | length 6.2
  Top Layer w0.254: P7.3 22.327,45.237 26.67,40.894 U2.4
NetQ1_3: Q1.3 R5.2 | length 2.2
  Top Layer w0.254: Q1.3 60.802,11.566 R5.2
NRST: C6.2 S1.1 U1.7 | length 22.8
  Top Layer w0.254: S1.1 13.691,15.982 v1(13.691,17.323) ; v1(24.078,19.737) 24.208,19.867 25.925,19.867 U1.7
  Bottom Layer w0.254: v1(13.691,17.323) C6.2 15.102,18.756 16.129,17.729 16.129,15.316 16.637,14.808 16.637,14.783 21.057,14.783 21.514,15.24 21.514,18.11 23.165,19.761 24.13,19.761 24.105,19.737 v1(24.078,19.737)
RCC_OSC_IN: C5.2 U1.5 Y1.2 | length 9.1
  Top Layer w0.254: Y1.2 20.36,22.287 C5.2 23.94,22.287 25.36,20.867 U1.5
RCC_OSC_OUT: C7.1 U1.6 Y1.1 | length 8.6
  Top Layer w0.254: Y1.1 20.309,20.182 C7.1 23.045,20.367 U1.6
RE_CLK: U1.38 U2.18 | length 10.6
  Top Layer w0.254: U2.18 29.381,33.153 29.381,32.055 33.162,28.274 U1.38
RE_DT: U1.39 U2.17 | length 11.9
  Top Layer w0.254: U2.17 28.891,31.104 29.686,31.104 32.662,28.128 U1.39
RE_SW: U1.40 U2.16 | length 13.9
  Top Layer w0.254: U2.16 26.808,30.647 29.496,30.647 32.162,27.981 U1.40
RS: P5.4 U1.25 | length 59.1
  Top Layer w0.254: U1.25 38.22,17.367 43.79,22.936 43.79,35.033 49.568,40.812 55.249,40.812 57.007,42.57 72.847,42.57 P5.4@75.514,45.237
RTC_INT: IC3.3 R4.1 U1.33 | length 30.9
  Top Layer w0.254: U1.33 36.682,21.367 v1(39.248,23.932) ; IC3.3 57.96,20.244 R4.1 58.194,20.269 v1(59.411,20.269)
  Bottom Layer w0.254: v1(39.248,23.932) 55.748,23.932 v1(59.411,20.269)
RW: P5.5 U1.26 | length 56.3
  Top Layer w0.254: U1.26 38.06,17.867 43.256,23.063 43.256,35.147 49.379,41.269 55.059,41.269 56.818,43.028 70.764,43.028 P5.5@72.974,45.237
SWCLK: P4.4 U1.37 | length 26.1
  Top Layer w0.254: P4.4 32.791,45.237 33.401,44.628 33.401,43.764 33.147,43.51 31.979,43.51 31.822,43.354 31.822,43.006 32.004,42.824 33.833,42.824 34.036,42.621 34.036,42.367 33.884,42.215 33.274,42.215 32.969,41.91 32.969,29.114 33.662,28.421 U1.37
SWDIO: P4.1 U1.34 | length 26.1
  Top Layer w0.254: U1.34 36.291,21.867 39.497,25.073 39.497,44.806 P4.1
TESTING_LED: D2.2 U1.2 | length 16.2
  Top Layer w0.254: D2.2 21.17,28.219 23.521,25.868 23.521,24.731 25.873,22.38 26.719,22.38 U1.2
UART_Rx: P6.2 U1.43 | length 30.8
  Top Layer w0.254: P6.2 8.153,33.68 8.153,32.588 8.611,32.131 11.049,29.693 28.651,29.693 30.662,27.682 U1.43
UART_Tx: P6.3 U1.42 | length 33.6
  Top Layer w0.254: P6.3 8.611,35.763 8.611,32.778 11.199,30.189 28.801,30.189 31.162,27.829 U1.42
Vin: C1.2 D1.2 IC1.3 R2.2 | length 22.8
  Top Layer w0.254: R2.2 25.298,12.446 25.679,12.065 28.042,12.065 28.715,11.392 28.715,5.771
  Top Layer w0.762: D1.2 26.624,5.771 28.715,5.771 30.805,5.771 C1.2 32.309,5.766 34.911,8.368 IC1.3
pads on no net: IC3.1 IC3.4 LOGO1.1 P5.7 P5.8 P5.9 P5.10 U1.1 U1.3 U1.4 U1.13 U1.14 U1.15 U1.16 U1.17 U1.18 U1.19 U1.20 U1.41 U1.45 U1.46 U2.5 U2.6 U2.7 U2.8 U2.9 U2.11 U2.12 U2.13 U2.14 U2.15

## Polygon pours and split planes (outlines as drawn)
GND on Top Layer "GND_L01_P000" (solid, remove dead copper, pour order 0): 0,-0.5 cw(c0,0) -0.5,0 -0.5,50 cw(c0,50) 0,50.5 90,50.5 cw(c90,50) 90.5,50 90.5,0 cw(c90,0) 90,-0.5
GND on Bottom Layer "GND_L02_P001" (solid, remove dead copper, pour order 1): 0,-0.5 cw(c0,0) -0.5,0 -0.5,50 cw(c0,50) 0,50.5 90,50.5 cw(c90,50) 90.5,50 90.5,0 cw(c90,0) 90,-0.5

## Keep-outs
Keep-Out Layer:
  lines w1: 0,0 0,50 90,50 90,0 0,0

## Silkscreen, mask and mechanical layers (free items; w line width, h text height)
Top Overlay:
  drawing of 11 lines, arcs and shapes, not listed
  text "GND" at 5.495,47.371 h0.89
  text "OUT" at 8.391,47.371 h0.89
  text "3V3" at 11.261,47.371 h0.89
  text "GND" at 15.833,47.371 h0.89
  text "3V3" at 18.805,47.371 h0.89
  text "SW" at 21.764,47.371 h0.89
  text "DT" at 24.329,47.371 h0.89
  text "SW" at 26.742,47.371 h0.89
  text "CLK" at 30.819,47.371 h0.89
  text "GND" at 33.816,47.371 h0.89
  text "3V3" at 36.737,47.371 h0.89
  text "IO" at 39.846,47.371 h0.89
  text "GND" at 2.422,39.573 h0.89
  text "Tx" at 3.311,37.025 h0.89
  text "Rx" at 3.311,34.476 h0.89
  text "3V3" at 2.422,31.928 h0.89
  text "GND" at 9.652,8.619 h0.89 r90
  text "VIN" at 9.652,4.782 h0.89 r90
Bottom Overlay:
  text "GND" at 46.194,47.269 h0.89
  text "BL" at 48.264,47.269 h0.89
  text "D7" at 50.88,47.269 h0.89
  text "D6" at 53.369,47.269 h0.89
  text "D5" at 55.935,47.269 h0.89
  text "D4" at 58.5,47.269 h0.89
  text "D3" at 61.04,47.269 h0.89
  text "D2" at 63.529,47.269 h0.89
  text "D1" at 65.947,47.269 h0.89
  text "D0" at 68.66,47.269 h0.89
  text "EN" at 71.2,47.269 h0.89
  text "RW" at 73.766,47.269 h0.89
  text "RS" at 76.255,47.269 h0.89
  text "VE" at 78.82,47.269 h0.89
  text "5V" at 81.36,47.269 h0.89
  text "GND" at 84.395,47.269 h0.89

## Text inside footprints (layer, text, board x,y; h text height)
B*1: Top Overlay "+" at 80.289,11.024 h2.86 r180
LOGO1: Top Overlay "PIF" at 84.599,2.21 h1.43
P5: Bottom Overlay "16" at 45.822,42.189 h1.02; Bottom Overlay "1" at 83.363,42.189 h1.02
P7: Top Overlay "1" at 27.476,43.537 h1.02 r180; Top Overlay "5" at 17.576,43.537 h1.02 r180